# Altium PCB Gas_Sensor_PCB.PcbDoc
Units mil, origin at the board's own origin, x right, y up, seen from the top; angles counter-clockwise.
Board outline 3543.31 x 1377.95 mil, 2 copper layers (Top Layer, Bottom Layer); 37 components, 22 nets, 123 pads, 41 vias.
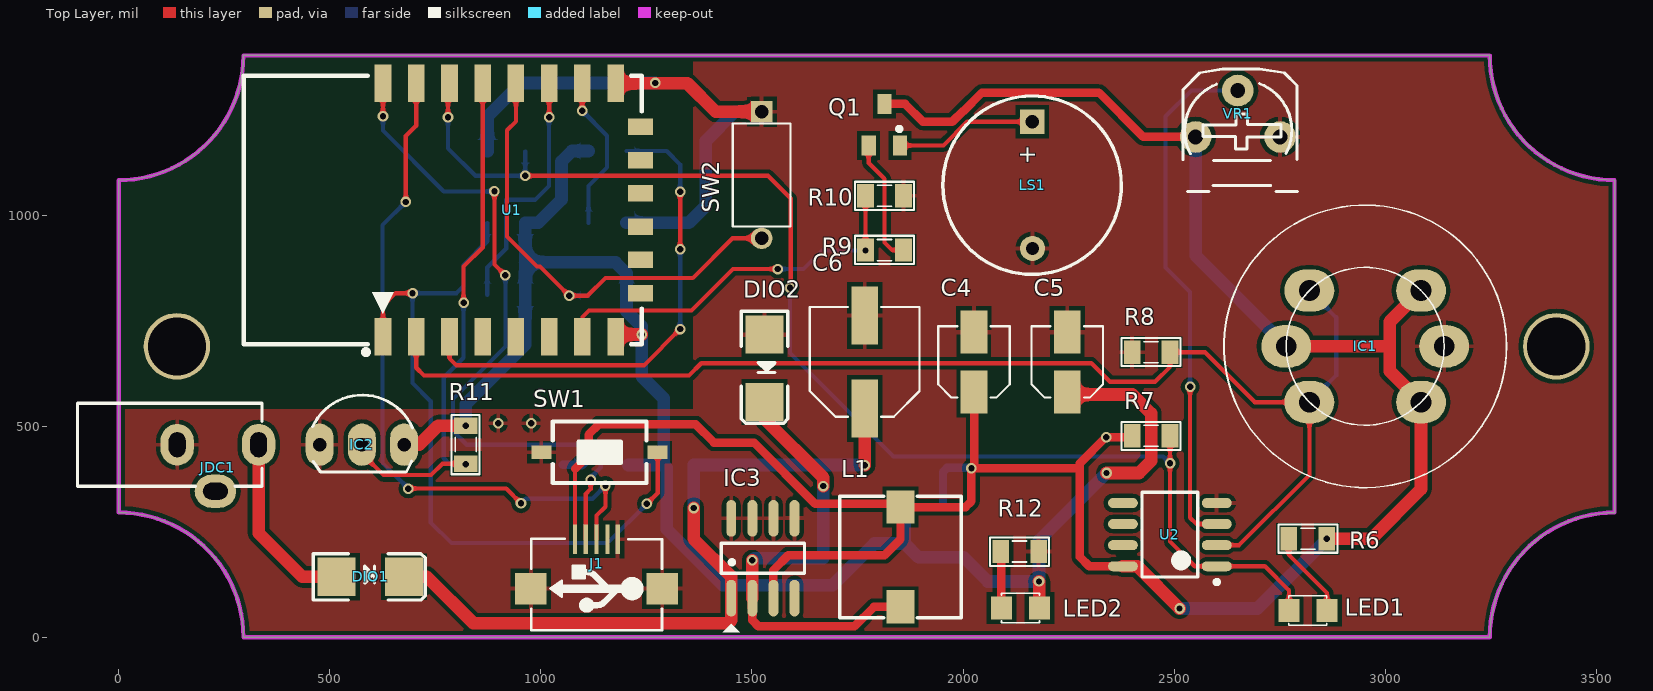
[diagram p0: Top Layer view]
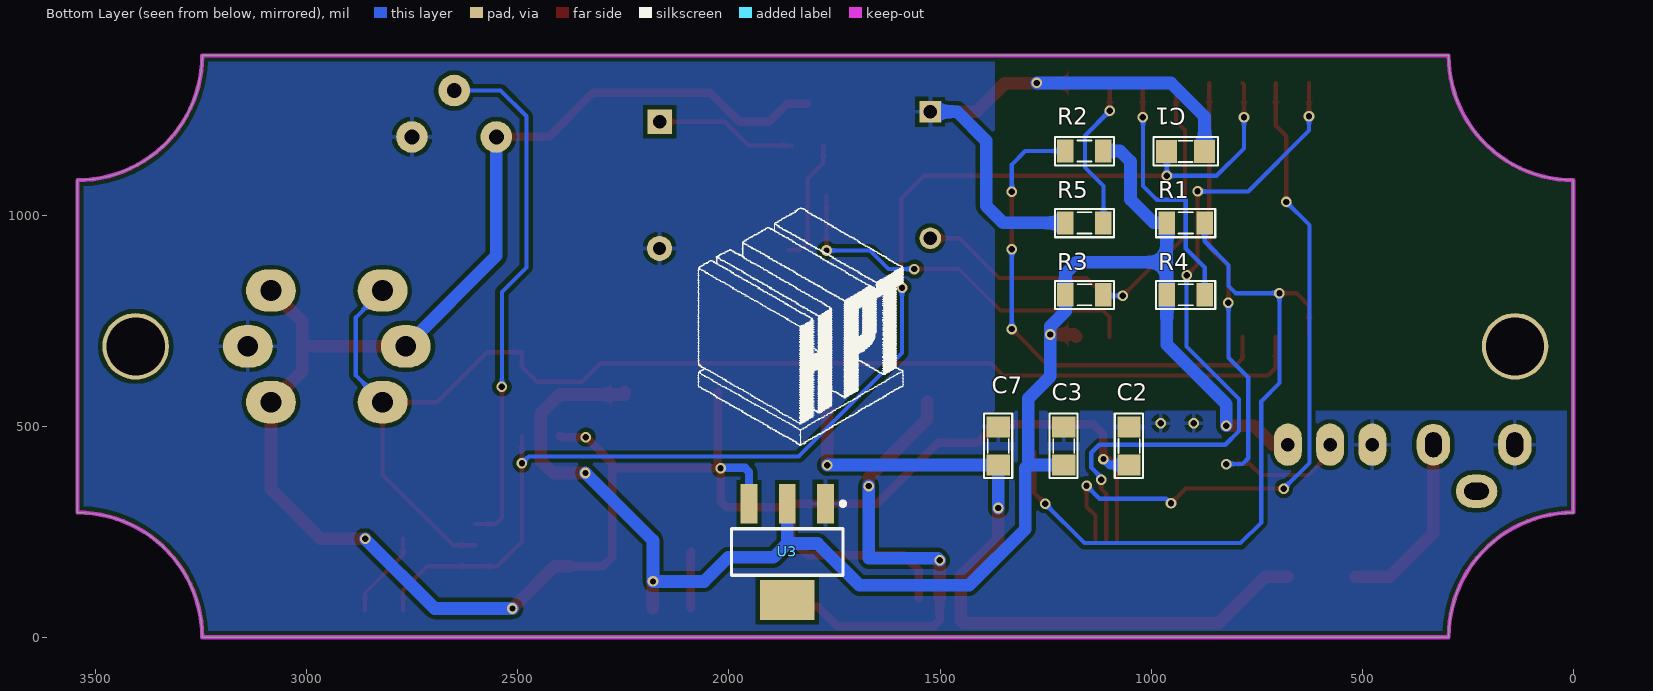
[diagram p1: Bottom Layer view, seen from below]
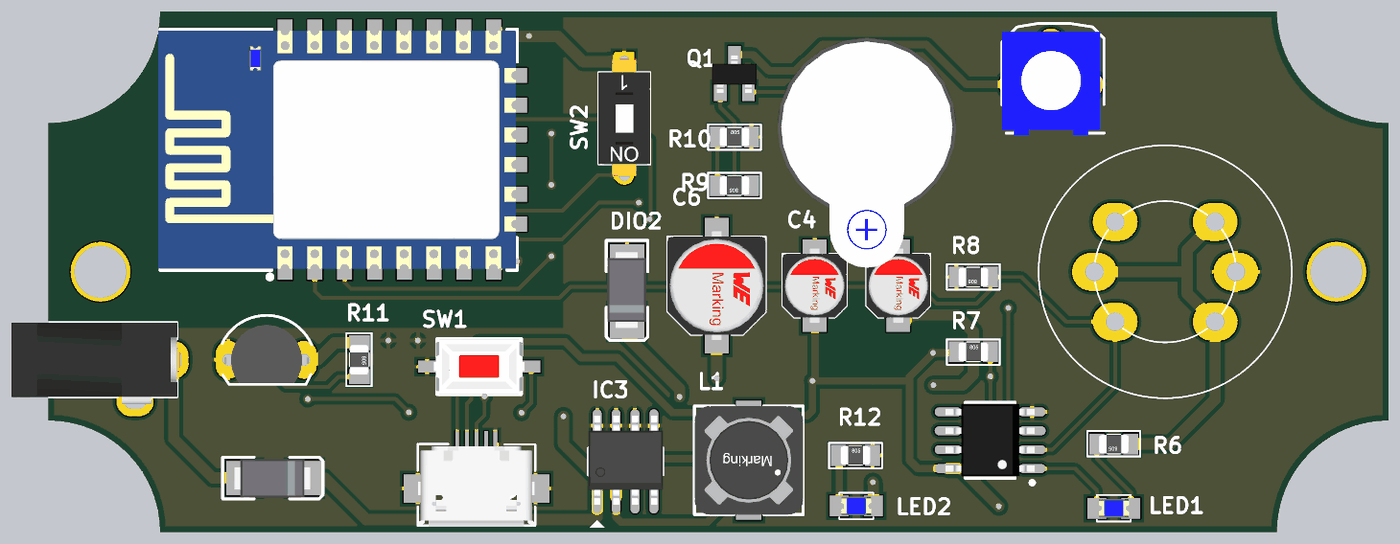
[diagram p2: 3D render of the assembled board from above, using the file's embedded part models]
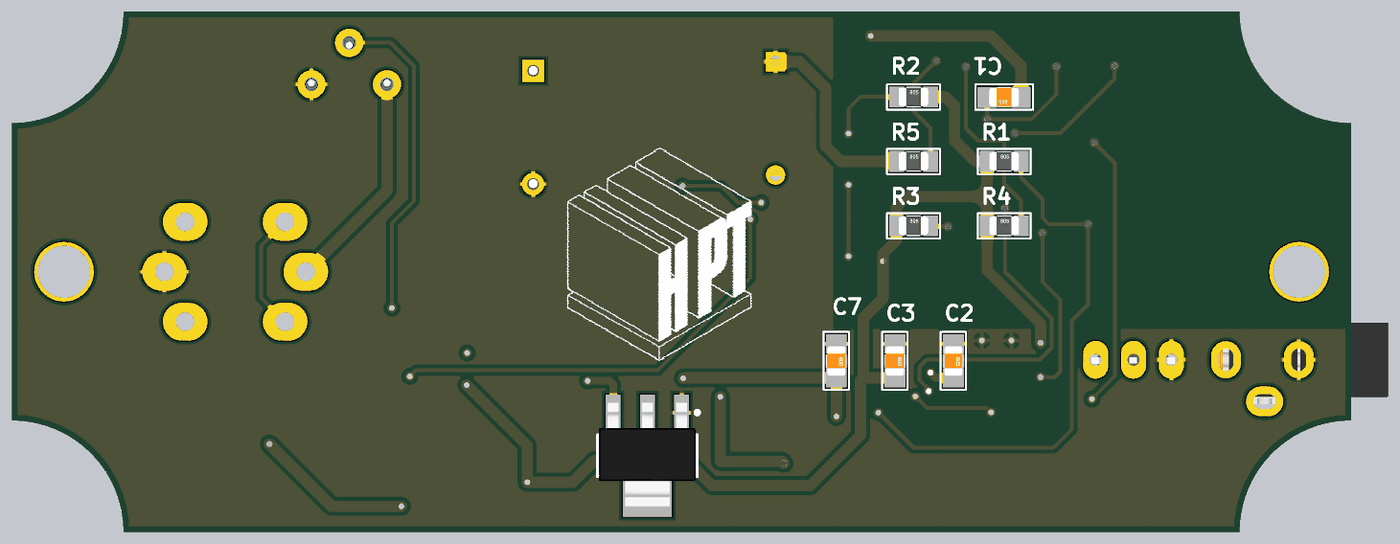
[diagram p3: 3D render of the assembled board from below, using the file's embedded part models]

## Layer stack, top to bottom
Top Solder: solder mask 0.4, Solder Resist, Dk 3.5
Top Layer: signal copper 1.4
Dielectric 1: dielectric 12.6, FR-4, Dk 4.8
Bottom Layer: signal copper 1.4
Bottom Solder: solder mask 0.4, Solder Resist, Dk 3.5

## Board outline
0,295.28 cw(c0,0) 295.28,0 3248.03,0 cw(c3543.31,0) 3543.31,295.28 3543.31,1082.68 cw(c3543.31,1377.95) 3248.03,1377.95 295.28,1377.95 cw(c0,1377.95) 0,1082.68

## Design rules (kind name [scope] priority, off if disabled: settings)
Clearance [All] p1: gap=10
PolygonConnect [All] p1: connectstyle=Relief reliefconductorwidth=10 reliefentries=4 polygonreliefangle="90 Angle" airgapwidth=10
RoomDefinition Gas_Sensor_Schematic [InComponentClass('Gas_Sensor_Schematic')] p1: confinementstyle=ConfineIn formatcopy=TRUE lockcomponents=FALSE outline 3754.13,-14 13099.13,-14 13099.13,1091 3754.13,1091
RoutingVias [All] p1: holewidth=15 width=25 viastyle="Through Hole" minholewidth=15 minwidth=25 maxholewidth=28 maxwidth=50
SolderMaskExpansion [All] p1: expansion=4
Width [All] p1: maxlimit=50 minlimit=8 preferedwidth=10
30 further rules are at their usual default settings.

## Components (designator, comment, footprint, x,y, rotation, side; value= is the part's Value field where it differs from the comment)
C1 "104" SM-CAP-0805 873.54,1150.77 r0 bottom
C2 "104" SM-CAP-0805 1052.23,498.04 r270 bottom
C3 "104" SM-CAP-0805 1207.11,498.04 r270 bottom
C4 "10uF 16V" CAP-ALU-SMD-4.5x5x1.4 2026,652 r90 top
C5 "10uF 16V" CAP-ALU-SMD-4.5x5x1.4 2247,652 r90 top
C6 "470uF" CAP-ALU-SMD-6.3x7.7x2.2 1767,652 r90 top
C7 "104" SM-CAP-0805 1362,498.04 r270 bottom
DIO1 "SS34" DIO-SMD-106 596,143 r180 top
DIO2 "SS34" DIO-SMD-106 1530,637 r90 top
IC1 "MQ-2" MQ-2 2952.76,688.98 r180 top
IC2 "DS18S20" DS18S20 576,456 r0 top
IC3 "xl1509-5V" SO-8 1526,187 r90 top
J1 "USB-5" USB-M1 1132,232 r180 top
JDC1 "Jac DC" DC3 331.5,455.98 r0 top
L1 "220uH" L-SMD-M-7.3x4.5 1852,190 r0 top
LED1 "LED" LED-0805-Blue 2862,63 r180 top
LED2 "LED" LED-0805-Blue 2181,69 r180 top
LS1 "Speaker" SPEAKER 2164,1221 r270 top
Q1 "C1815" SOT23B 1814,1214 r0 top
R1 "10K" RES-SMD-0805 918.04,981.39 r180 bottom
R2 "1K" RES-SMD-0805 1158.04,1151.77 r180 bottom
R3 "10K" RES-SMD-0805 1158.04,811 r180 bottom
R4 "10K" RES-SMD-0805 918.04,811 r180 bottom
R5 "10K" RES-SMD-0805 1158.04,981.39 r180 bottom
R6 "10K" RES-SMD-0805 2817,233 r180 top
R7 "10K" RES-SMD-0805 2445.48,477 r0 top
R8 "1K" RES-SMD-0805 2445.48,675 r180 top
R9 "1K" RES-SMD-0805 1814,917 r180 top
R10 "10K" RES-SMD-0805 1814,1045.83 r0 top
R11 "4K7" RES-SMD-0805 822,456 r270 top
R12 "1K" RES-SMD-0805 2134,203 r0 top
SW1 "Reset" SW1-SMD 1139,438 r0 top
SW2 "Flash" SW-DIP1 1523,1095 r180 top
U1 "ESP_12_E" ESP_12_E 626,697 r90 top
U2 "LM393" SO8 2490,243 r180 top
U3 "LM1117-3.3V" SOT223 1862,202 r0 bottom
VR1 "10K" VR 2551,1185 r0 top

## Footprints (in the part's own frame and the unit in brackets; to place one, negate y for a bottom-side part, rotate by r counter-clockwise, add the part's x,y. Pads: shape width x height; smd on the part's side, far side on the other; paste and mask are expansions set on the pad)
CAP-ALU-SMD-4.5x5x1.4 [mm]
  rect 2.6x1.6 smd: 1(-1.8,0) 2(1.8,0)
  silkscreen extent -2.15,-2.15 2.15,2.15, body extent -2.5,-2.15 2.5,2.15, height 5.45
CAP-ALU-SMD-6.3x7.7x2.2 [mm]
  rect 3.5x1.6 smd: 1(-2.8,0) 2(2.8,0)
  silkscreen extent -3.3,-3.3 3.3,3.3, body extent -3.65,-3.3 3.65,3.3, height 7.65
DC3 [mm] "WR-DC_DC Power Jack_Right Angled_THT Center Pin ?1.0_Plug ID ?1.05_Plug OD ?3.5"
  oval 2x2.5 hole 1 slot 1.5 at 90 deg: 1(0,0) 2(-4.9,0)
  oval 2.5x2 hole 1 slot 1.5 at 0 deg: 3(-2.6,-2.8)
  silkscreen extent -10.9,-2.5 0.2,2.5, body extent -10.9,-3 0.4,2.5, height 7.81
DIO-SMD-106 [mil]
  rect 90x90.55 smd: 1(80,0) 2(-80,0)
  silkscreen extent -130,-55 135,55, body extent -99,-50 106,52, height 95
DS18S20 [mil] "TO-92"
  oval 66x100 hole 32: 3(100,0) 4(0,0) 5(-100,0)
  silkscreen extent -117,-65 120,118, body extent -109,-62 111,93, height 119
ESP_12_E [mm] "ESP-12 Wi-Fi Module by AI-Thinker"
  rect 2.25x1 smd: 1(0.375,0) 2(0.375,-2) 3(0.375,-4) 4(0.375,-6) 5(0.375,-8) 6(0.375,-10) 7(0.375,-12) 8(0.375,-14) 15(15.625,-14) 16(15.625,-12) 17(15.625,-10) 18(15.625,-8) 19(15.625,-6) 20(15.625,-4) 21(15.625,-2) 22(15.625,0)
  rect 1x1.5 smd: 9(3,-15.5) 10(5,-15.5) 11(7,-15.5) 12(9,-15.5) 13(11,-15.5) 14(13,-15.5)
  silkscreen extent -0.7,-15.57 16.08,8.37, body extent 0,-15.49 16,8.51, height 2.75
L-SMD-M-7.3x4.5 [mm] "WE-PDA SMD Shielded Power Inductor, 7345"
  rect 1.7x2 smd: 1(0,3) 2(0,-3)
  silkscreen extent -3.65,-3.65 3.65,3.65, body extent -3.65,-3.65 3.65,3.65, height 4.05
LED-0805-Blue [mil]
  rect 50x55 smd: 1(0,0) 2(90,0)
  silkscreen extent 0,-35 90,35, body extent 5,-25 85,25, height 43
MQ-2 [mm] "MQ-2 GAS SENSOR"
  oval 3x2.54 hole 1.25: 1(-3.359,3.359) 2(-4.75,0) 3(-3.359,-3.359) 4(3.359,-3.359) 5(4.75,0) 6(3.359,3.359)
  silkscreen extent -8.5,-8.5 8.5,8.5, body extent -8.43,-8.48 8.5,8.48, height 16.7
RES-SMD-0805 [mil]
  rect 39.37x55 smd: 1(-45,0) 2(45,0)
  silkscreen extent -70,-34 70,33, body extent -39,-25 39,25, height 31
SM-CAP-0805 [mil]
  rect 50x55 smd: 1(0,0) 2(90,0)
  silkscreen extent -32,-34 121,33, body extent 6,-25 84,25, height 31
SO8 [mm] "SOIC, 8-Leads, Body 4.9x3.9mm, Pitch 1.27mm, IPC High Density"
  oval 1.8x0.6 smd: 1(-2.825,1.905) 2(-2.825,0.635) 3(-2.825,-0.635) 4(-2.825,-1.905) 5(2.825,-1.905) 6(2.825,-0.635) 7(2.825,0.635) 8(2.825,1.905)
  silkscreen extent -2.95,-2.55 1.68,2.98, body extent -2.99,-2.45 3,2.45, height 1.6
SO-8 [mm] "8-Pin Small Outline Integrated Circuit 1.27 mm Pitch, IPC Medium Density"
  oval 2.2x0.6 smd: 1(-2.4,1.905) 2(-2.4,0.635) 3(-2.4,-0.635) 4(-2.4,-1.905) 5(2.4,-1.905) 6(2.4,-0.635) 7(2.4,0.635) 8(2.4,1.905)
  silkscreen extent -4.44,-2.5 0.9,2.5, body extent -2.93,-2.51 3.08,2.49, height 1.75
SOT23B [mm] "SOT 23B"
  rect 0.85x1.2 smd: 1(0.94,-1.245) 2(0,1.25) 3(-0.95,-1.25)
  silkscreen extent 0.77,-0.38 1.02,-0.13, body extent -1.5,-1.3 1.5,1.2, height 1.06
SOT223 [mm]
  rect 1x2.4 smd: 1(-2.3,-2.9) 2(0,-2.9) 3(2.3,-2.9)
  rect 3.3x2.4 smd: 4(0,2.9)
  silkscreen extent -3.47,-3.02 3.35,1.4, body extent -3.25,-3.56 3.25,3.4, height 1.68
SPEAKER [mm]
  rect 1.5x1.5 hole 0.8: 1(0,0)
  round 1.5 hole 0.8: 2(7.62,0.013)
  silkscreen extent -1.55,-5.38 9.18,5.36, body extent -2.22,-6 13.24,6, height 4.5
SW1-SMD [mm]
  rect 1.2x0.8 smd: 1(-3.5,0) 2(3.5,0)
  silkscreen extent -2.82,-1.85 2.82,1.85, body extent -3.05,-1.85 3.05,1.85, height 2.5
SW-DIP1 [mm]
  rect 1.3x1.3 hole 0.8: 1(0,-3.81)
  round 1.3 hole 0.8: 2(0,3.81)
  silkscreen extent -1.74,-3.1 1.74,3.1, body extent -1.74,-3.98 1.74,3.89, height 3.95
USB-M1 [mil]
  rect 10x70 smd: 1(51.18,0) 2(25.59,0) 3(0,0) 4(-25.59,0) 5(-50,0)
  rect 74.8x74.8 smd: 5(-155.51,116.84) 5(155.51,116.84)
  silkscreen extent -155,-1 155,215, body extent -157,5 158,218, height 107
VR [mil] "Resistor Variable"
  round 75 hole 35: 1(0,0) 2(100,110) 3(200,0)
  silkscreen extent -30,-129 241,161, body extent -30,-135 230,140, height 177

## Part data
C1 C2 C3 C7: library part CN
C4 C5 C6: library part CN-ALU-SMD, "Polarized Capacitor (Axial)"
DIO1 DIO2: library part "Diode SMD", "Default Diode"
IC1: "MQ-2 GAS SENSOR"
IC2: "High Precision  1-Wire® Digital Thermometer"
IC3: library part LS1240A, "Electronic Two-Tone Ringer"
JDC1: library part DCIN, "Jac DC input"
L1: library part L-SMD-1
LED1 LED2: library part "LED SMD"
LS1: "Loudspeaker"
Q1: "NPN 600mW, ECB"
R1 R2 R3 R4 R5 R6 R7 R8 R9 R10 R11 R12: library part Res-SMD, "Resistor"
SW1 SW2: library part SW2, "Switch button 2 pin"
U1: "ESP-12 Wi-Fi Module by AI-Thinker"
U2: "IC DUAL COMPARATOR"
U3: library part LM1117, "800mA Low-Dropout Linear Regulator"
VR1: library part VR, "Var Resistor"

## Free pads (board coordinates)
  round 157.48 hole 137.8: 1(137.8,688.98) 4(3405.51,688.98)

## Via types
v1: diameter 25, hole 15, Top Layer to Bottom Layer, tented both sides, 41 vias

## Nets (pads, with @x,y where several pads share a name; then routed paths per layer and width w, separated by ;. In a path a pad name is that pad's centre, name@x,y a point inside that pad or via, vN(x,y) a via of type N, cw(c..) or ccw(c..) an arc to the next point about the centre after c; other vN are vias at no path point)
3.3V: C3.2 C5.1 IC2.3 LED2.1 R1.1 R2.2 R3.1 R4.1 R11.1 U1.8 U3.2 | length 3970.5
  Top Layer w30: IC2.3 712,456 757,501 v1(822,501) ; U1.8 1182.42,717 v1(1239,717) ; v1(2180,132) 2181,131 LED2.1 ; C5.1 2247,575 2401,575 2445.8,530.2 2445.8,417.8 2417,389 v1(2340,389)
  Bottom Layer w30: v1(822,501) 822,552 963.04,693.04 R4.1 963.04,888 ; R2.2 1073.77,1151.77 1049,1127 1049,1037 993.39,981.39 R1.1 963.04,888 ; C3.2 1290.96,408.04 ; U3.2 1862,222 ; v1(2340,389) 2180,229 v1(2180,132) 2059,132 2002,189 1895,189 1862,222 ; 963.04,888 1177,888 1203.04,861.96 R3.1 1203.04,772.04 1239,736.09 v1(1239,717) 1239,618 1290.96,566.04 1290.96,408.04 ; 1290.96,408.04 1298,401 1298,256 1431,123 1691,123 1790,222 1862,222
5V: C2.2 C4.1 IC1.1 IC1.3 IC1.5 IC3.3 J1.1 L1.1 Q1.2 R6.1 R7.1 U2.8 U3.3 VR1.1 | length 6014.3
  Top Layer w10: J1.1 1080.82,398.82
  Top Layer w20: 1080.82,398.82 1104,422 v1(1113,422) 1113,480 1137,504 1367,504 1410,461 1505,461 1649.83,316.17 1843.94,316.17 L1.1 ; IC3.3 1551,159 1586,194 1814,194 1852,232 L1.1 ; Q1.2 1862.79,1263.21 1905,1221 1974.64,1221 1999.64,1246 2001,1246 2045,1290 2322,1290 2427,1185 VR1.1 ; C4.1 2027,580.13 2027,407 v1(2020,400) ; U2.8 2299,168 2277,190 2277,399 ; R7.1 2397.48,474 v1(2339,474) 2277,412 2277,399 ; L1.1 2006.11,308.11 2020,322 v1(2020,400) ; v1(2020,400) 2276,400 2277,399
  Top Layer w30: U2.8 2413,168 v1(2513,68) ; IC1.5 3011,688.98 ; v1(2862,233) 2967,233 3084.99,350.99 IC1.1 3011,630.73 3011,688.98 ; IC1.3 3011,747.22 3011,688.98
  Bottom Layer w20: C2.2 1099.04,408.04 v1(1113,422) ; U3.3 1952.55,391.55 1962,401 2019,401 v1(2020,400)
  Bottom Layer w30: v1(2513,68) 2697,68 v1(2862,233) ; VR1.1 2551,903.72 IC1.5
12V: C6.1 C7.2 DIO1.2 IC3.1 | length 1768.6
  Top Layer w30: DIO1.2 730,143 840,33 1444,33 1451,40 IC3.1 1451,144 1362,233 v1(1362,306) ; v1(1767,407) C6.1
  Bottom Layer w30: v1(1362,306) C7.2 1765.96,408.04 v1(1767,407)
ADC: IC1.4 IC1.6 R8.1 U1.2 U2.2 | length 3102.8
  Top Layer w10: U1.2 704.74,638.26 723,620 1351,620 1380,649 2304,649 2348,605 2455,605 2490.49,640.49 R8.1 2573,675 2691.26,556.74 IC1.6 2820.52,384.52 2654,218 U2.2
  Bottom Layer w10: IC1.6 2884,620.22 2884,757.73 IC1.4
DC: C1.2 LED1.2 R7.2 U1.20 U2.1 | length 3077.2
  Top Layer w10: v1(780,1232) 780,1308.68 U1.20 ; v1(963,1093) 1538,1093 1592,1039 1592,830 v1(1590,828) ; R7.2@2490.48,476 2490.48,226.52 2549,168 U2.1 2715,168 2772,111 LED1.2
  Bottom Layer w10: v1(780,1232) 780,1158 845,1093 v1(963,1093) 963,1150.23 C1.2 ; v1(1590,828) 1590,673 1835,428 2474.48,428 v1(2490.48,412)
DQ: IC2.4 R11.2 U1.19 | length 1283.5
  Top Layer w10: IC2.4 576,435 627,384 740,384 767,411 R11.2 ; v1(817,792) 817,878 862.22,923.22 U1.19
  Bottom Layer w10: v1(817,792) 817,662 770,615 770,424 784,410 v1(822,410)
GND: C1.1 C2.1 C3.1 C4.2 C5.2 C6.2 C7.1 DIO2.1 IC1.2 IC2.5 IC3.5 IC3.6 IC3.7 IC3.8 J1.5 JDC1.2 LS1.2 R5.1 R8.2 R10.2 R12.2 SW1.1 SW2.1 U1.15 U2.4 U3.1 VR1.3 | length 1406.1
  Top Layer w30: U1.15 1346.84,1312.16 1414,1245 SW2.1
  Bottom Layer w30: C1.1 873.54,1233.54 953,1313 v1(1271,1313) ; R5.1 1350.39,981.39 1391,1022 1391,1176 1460,1245 SW2.1
  other v1: 899,507 977,507
LOA: R9.2 R10.1 U1.7 | length 911.3
  Top Layer w10: U1.7 1098.44,758.44 1114,774 1357,774 1455,872 v1(1561,872) ; R9.2 R10.1
  Bottom Layer w10: v1(1561,872) 1622,872 1666,916 v1(1769,916)
NetDIO1_1: DIO1.1 JDC1.1 | length 436.9
  Top Layer w30: JDC1.1 331.5,246.5 435,143 DIO1.1
NetDIO2_2: DIO2.2 IC3.2 L1.2 | length 1115.5
  Top Layer w20: IC3.2 1501,40 1515,26 1743,26 1788.89,71.89 L1.2
  Top Layer w30: IC3.2 v1(1501,182) ; DIO2.2 1530,517 1669,378 v1(1669,358)
  Bottom Layer w30: v1(1501,182) 1506,187 1669,187 v1(1669,358)
NetLED1_1: LED1.1 R6.2 | length 207.3
  Top Layer w10: R6.2 2772,195 2862,105 LED1.1
NetLED2_2: LED2.2 R12.1 | length 134.8
  Top Layer w20: R12.1 2091,201 LED2.2
NetLS1_1: LS1.1 Q1.1 | length 336.2
  Top Layer w10: Q1.1 1954,1165 2010,1221 LS1.1
NetQ1_3: Q1.3 R9.1 | length 297.7
  Top Layer w10: Q1.3 1776.6,1123.4 1814,1086 1814,935 1832,917 R9.1
NetR1_2: R1.2 SW1.2 U1.1 | length 1720.6
  Top Layer w10: U1.1 626,785 656,815 v1(696,815) ; v1(1251,316) 1276.8,341.8 SW1.2
  Bottom Layer w10: R1.2 873.04,938.04 817,882 817,832 800,815 v1(696,815) 696,602 739,559 739,272 788,223 1158,223 v1(1251,316)
NetR2_1: R2.1 U1.3 | length 1170.3
  Top Layer w10: U1.3 783.48,660.52 800,644 1244,644 v1(1330,730) ; v1(1330,919) v1(1330,1055)
  Bottom Layer w10: R2.1 1298.23,1151.77 1330,1120 v1(1330,1055) ; v1(1330,730) v1(1330,919)
NetR3_2: R3.2 SW2.2 U1.18 | length 1136
  Top Layer w10: U1.18 940.96,1221.96 920,1201 920,949 991,878 998,878 v1(1067,809) 1111.04,809 1153.04,851 1360,851 1454,945 SW2.2
  Bottom Layer w10: v1(1067,809) 1111.04,809 R3.2
NetR4_2: R4.2 U1.17 | length 601.7
  Top Layer w10: v1(1019.7,1231.7) U1.17
  Bottom Layer w10: R4.2 873.04,876.04 918,921 918,1036 986,1036 1019,1069 1019,1231 v1(1019.7,1231.7)
NetR5_2: R5.2 U1.16 | length 373.6
  Top Layer w10: v1(1098,1247) 1098,1311.72 U1.16
  Bottom Layer w10: v1(1098,1247) 1157,1188 1157,1113 1113.04,1069.04 R5.2
NetU2_3: U2.3 VR1.2 | length 1240.7
  Top Layer w10: v1(2538,593) 2538,283 2553,268 U2.3
  Bottom Layer w10: v1(2538,593) 2538,818 2480,876 2480,1234 2541,1295 VR1.2
RX: J1.2 U1.22 | length 1656.5
  Top Layer w10: v1(626,1234) U1.22 ; v1(890,1056) 890,883 v1(916,857) ; J1.2 1106.41,339.41 1118,351 v1(1118,373)
  Bottom Layer w10: v1(626,1234) 626,1200 770,1056 v1(890,1056) ; v1(916,857) 916,688.43 792,564.43 792,488.58 824.58,456 1123,456 1142,437 1142,402.11 1118,378.11 v1(1118,373)
TX: J1.3 U1.21 | length 1653
  Top Layer w10: v1(680,1031) 680,1187 704.74,1211.74 U1.21 ; v1(686,352) 918,352 v1(953,317) ; J1.3 1132,288 1153,309 v1(1153,359)
  Bottom Layer w10: v1(680,1031) 625,976 625,413 v1(686,352) ; v1(953,317) 964,328 1122,328 v1(1153,359)
pads on no net: IC3.4 J1.4 JDC1.3 U1.4 U1.5 U1.6 U1.9 U1.10 U1.11 U1.12 U1.13 U1.14 U2.5 U2.6 U2.7 U3.4

## Polygon pours and split planes (outlines as drawn)
GND on Top Layer "Top Layer-No Net" (solid, remove dead copper, pour order 0): 0,295.28 0,540 1361,540 1361,1377.95 3248.03,1377.95 3543.31,1377.95 3543.31,303 3543.31,0 3248.03,0 295.28,0
GND on Bottom Layer "Top Layer-No Net" (solid, remove dead copper, pour order 2): 0,295.28 0,537 1371,537 1371,1377.95 3248.03,1377.95 3543.31,1377.95 3543.31,295.28 3543.31,0 295.28,0

## Keep-outs
Keep-Out Layer:
  the board outline again, w10

## Silkscreen, mask and mechanical layers (free items; w line width, h text height)
Bottom Overlay:
  drawing of 2330 lines, arcs and shapes, not listed

## Text inside footprints (layer, text, board x,y; h text height)
LS1: Top Overlay "+" at 2136,1165.5 h40 r270
U1: Mechanical 13 "ANTENNA AREA" at 316,702 h10 r90; Mechanical 13 "CUTOUT POLYGON" at 336,702 h10 r90